# Altium PCB CBU-PCB.PcbDoc (part 2 of 2)
Units mm, origin at the board's own origin, x right, y up, seen from the top; angles counter-clockwise.
Board outline 133.83 x 85.72 mm, 4 copper layers (Top, GND, PWR, Bottom), stack 1.585 mm thick; 138 components, 74 nets, 476 pads, 131 vias.
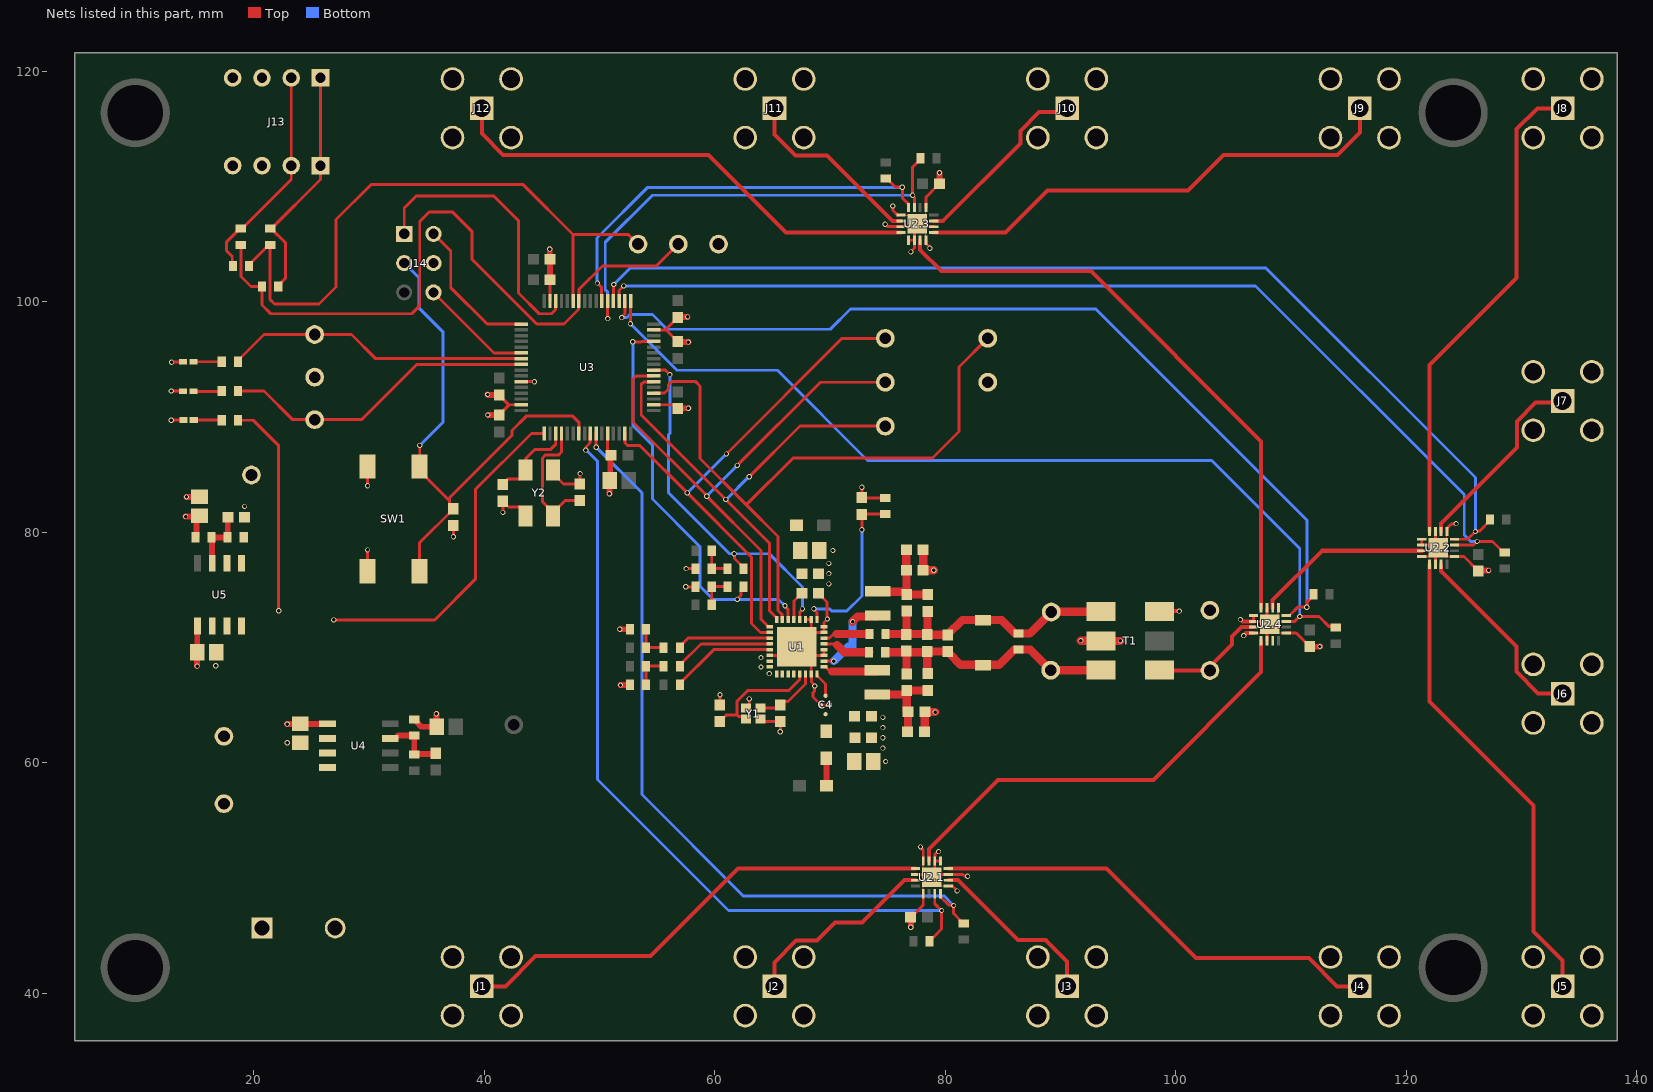
[diagram p4: the nets of this part, all layers, seen from the top]

## Via types
v1: diameter 0.45, hole 0.3, Top to Bottom, 131 vias

## Nets (pads, with @x,y where several pads share a name; then routed paths per layer and width w, separated by ;. In a path a pad name is that pad's centre, name@x,y a point inside that pad or via, vN(x,y) a via of type N, cw(c..) or ccw(c..) an arc to the next point about the centre after c; other vN are vias at no path point) (continued)
3V6: 3V6.1 C39.1 C40.1 J13.4 R28.2 U5.5 U5.6 | length 1.1
  Top w0.508: v1(14.148,83.058) 15.252,83.058 C40.1@15.265,83.071
  other v1: 19.193,82.236
ANTENNA_N: A_N.1 C13.1 C14.2 C15.2 C16.2 C19.2 C41.2 R10.1 R11.1 T1.4 | length 24.6
  Top w0.721: R11.1@74.817,71.163 C13.1@76.644,71.163 ; C13.1@76.632,71.128 76.644,71.14 C13.1@76.644,71.163 ; C19.2@76.657,73.144 76.644,73.131 C13.1@76.644,71.163 ; C16.2@78.486,73.118 78.461,73.093 C14.2@78.461,71.163 ; T1.4@93.524,73.101 93.511,73.088 89.218,73.088 87.339,71.21 R10.1@86.36,71.21 86.066,71.21 84.893,72.384 83.253,72.384 81.488,72.384 80.213,71.109 C15.2@80.213,71.086 80.205,71.094 78.443,71.094 C14.2@78.435,71.102 78.461,71.128 C14.2@78.461,71.163 ; C13.1@76.644,71.163 C14.2@78.461,71.163
ANTENNA_P: A_P.1 C9.2 C10.2 C13.2 C14.1 C15.1 C41.1 R4.1 R10.2 T1.6 | length 24.4
  Top w0.721: R4.1@74.792,69.588 C13.2@76.644,69.588 ; C13.2@76.632,69.674 76.644,69.661 C13.2@76.644,69.588 ; C10.2@76.657,67.708 76.644,67.721 C13.2@76.644,69.588 ; C14.1@78.435,69.648 C14.1@78.443,69.64 ; C9.2@78.461,67.724 78.448,67.737 C14.1@78.448,69.588 ; T1.6@93.524,68.021 A_P.1@89.154,68.021 87.365,69.81 R10.2@86.36,69.81 85.99,69.81 84.664,68.484 83.253,68.484 81.338,68.484 80.309,69.514 80.309,69.537 80.205,69.64 C14.1@78.443,69.64 ; C13.2@76.644,69.588 C14.1@78.448,69.588 ; C14.1@78.443,69.64 78.448,69.636 C14.1@78.448,69.588
GND: C1.2 C2.2 C3.2 C4.2 C5.2 C6.2 C7.2 C8.1 C11.2 C12.2 C17.1 C18.1 C20.2 C21.2 C22.1.2 C22.2.2 C22.3.2 C22.4.2 C23.2 C24.2 C25.2 C26.2 C27.2 C28.2 C29.2 C30.2 C31.2 C32.2 C33.2 C34.2 C35.2 C37.2 C38.2 C40.2 D1.1 D2.1 D3.1 GND.1 J1.2 J1.3 J1.4 J1.5 J2.2 J2.3 J2.4 J2.5 J3.2 J3.3 J3.4 J3.5 J4.2 J4.3 J4.4 J4.5 J5.2 J5.3 J5.4 J5.5 J6.2 J6.3 J6.4 J6.5 J7.2 J7.3 J7.4 J7.5 J8.2 J8.3 J8.4 J8.5 J9.2 J9.3 J9.4 J9.5 J10.2 J10.3 J10.4 J10.5 J11.2 J11.3 J11.4 J11.5 J12.2 J12.3 J12.4 J12.5 J13.3 J14.4 J15.2 R3.1 R5.1 R6.1 R14.1 R15.1 R27.1 R29.1 SW1.2 SW1.4 T1.3 T1.5 U1.3 U1.4 U1.7 U1.8 U1.10 U1.11 U1.22 U1.23 U1.24 U1.25 U1.26 U1.27 U1.28 U1.31 U1.33 U2.1.1 U2.1.5 U2.1.7 U2.1.9 U2.1.10 U2.1.12 U2.1.14 U2.1.17 U2.2.1 U2.2.5 U2.2.7 U2.2.9 U2.2.10 U2.2.12 U2.2.14 U2.2.17 U2.3.1 U2.3.5 U2.3.7 U2.3.9 U2.3.10 U2.3.12 U2.3.14 U2.3.17 U2.4.1 U2.4.5 U2.4.7 U2.4.9 U2.4.10 U2.4.12 U2.4.14 U2.4.17 U3.12 U3.18 U3.31 U3.47 U3.59 U3.63 U4.1 U5.1 Y1.2 Y1.4 Y2.2 Y2.4 | length 158.1
  Top w0.102: U2.3.5@76.151,107.513 76.826,107.513 U2.3.17@77.576,106.763 ; U2.1.1@78.092,48.621 78.092,49.296 U2.1.17@78.842,50.046 ; U2.1.12@78.092,51.471 78.092,50.796 78.592,50.296 U2.1.17@78.842,50.046 ; U2.3.12@78.326,105.338 78.326,106.013 77.826,106.513 U2.3.17@77.576,106.763 ; U2.3.1@78.326,108.188 78.326,107.513 U2.3.17@77.576,106.763 ; U2.1.5@80.267,49.296 79.592,49.296 U2.1.17@78.842,50.046 ; U2.4.12@106.746,71.259 107.421,71.259 U2.4.17@107.921,71.759 ; U2.4.5@108.921,73.434 108.919,73.432 108.921,73.43 108.921,72.759 U2.4.17@108.171,72.009 108.921,71.259 U2.4.1@109.596,71.259 ; C22.4.2@111.633,70.063 C22.4.2@111.633,70.086 ; U2.2.17@122.784,78.638 123.534,79.388 U2.2.5@123.534,80.063
  Top w0.152: U2.2.12@121.361,77.89 122.035,77.89 U2.2.17@122.534,78.388 ; U2.2.17@122.784,78.638 123.532,77.89 U2.2.1@124.209,77.888 U2.2.1@124.209,77.888
  Top w0.254: v1(12.827,89.713) 12.84,89.725 13.863,89.725 D3.1@13.876,89.738 ; v1(12.827,92.253) 12.84,92.24 13.838,92.24 D2.1@13.85,92.227 ; v1(12.852,94.742) 12.878,94.767 13.818,94.767 D1.1@13.843,94.793 ; SW1.4@29.856,76.603 29.87,76.618 v1(29.87,78.461) ; SW1.2@29.856,85.703 29.87,85.688 v1(29.87,84.023) ; v1(37.313,79.604) C34.2@37.313,80.578 ; C25.2@41.275,90.16 41.275,90.183 42.112,91.021 42.112,91.06 ; C26.2@41.275,91.92 41.275,91.897 42.112,91.06 ; v1(41.605,81.712) C24.2@41.605,82.664 ; C24.2@41.605,82.687 C24.2@41.605,82.664 ; U3.63@43.196,91.06 42.112,91.06 ; U3.59@43.196,93.06 v1(44.344,93.06) ; Y2.4@43.564,81.407 43.564,81.707 43.091,82.18 42.089,82.18 C24.2@41.605,82.664 ; U3.47@45.696,100.06 45.696,101.89 C27.2@45.71,101.905 ; Y2.2@45.964,85.407 45.964,85.107 46.88,84.191 C23.2@48.297,84.191 48.311,84.205 v1(48.311,85.09) ; U3.12@50.696,88.56 50.696,86.966 C32.2@50.997,86.665 ; R6.1@52.617,71.577 R6.1@52.626,71.586 ; U3.18@54.696,91.06 56.44,91.06 56.769,90.731 C30.2@56.769,90.729 ; U3.31@54.696,97.56 55.768,97.56 ; C29.2@56.769,96.536 56.769,96.559 55.768,97.56 ; C28.2@56.769,98.638 56.769,98.615 55.768,97.613 55.768,97.56 ; v1(57.48,75.26) 58.323,75.26 R14.1@58.335,75.273 ; v1(57.506,76.835) 58.332,76.835 R15.1@58.335,76.832 ; C20.2@60.441,65.007 60.452,65.018 v1(60.452,65.888) ; Y1.4@62.699,64.746 62.732,64.746 62.992,65.007 v1(62.992,65.532) ; Y1.2@63.974,63.771 64.182,63.563 C21.2@65.673,63.563 65.684,63.552 v1(65.684,62.687) ; U1.22@64.771,69.306 66.371,69.306 U1.33@67.121,70.056 U1.33@68.371,71.306 ; U1.11@67.871,72.406 U1.10@68.371,72.406 U1.33@68.371,71.306 ; C3.2@69.002,74.698 69.748,73.952 69.748,72.492 v1(69.774,72.466) 69.471,72.163 U1.8@69.471,71.806 U1.7@69.471,71.306 U1.33@68.371,71.306 ; U1.4@69.471,69.806 U1.3@69.471,69.306 67.871,69.306 68.371,68.806 U1.31@68.371,67.706 68.385,67.692 68.385,66.994 68.682,66.698 v1(68.682,66.65) 68.661,66.629 68.661,66.196 68.529,66.064 68.529,65.685 C4.2@69.21,65.004 C4.2@70.01,65.004 ; v1(72.771,83.896) C8.1@72.771,82.998 72.798,82.971 R3.1@74.803,82.971 ; v1(74.778,106.731) 74.831,106.731 75.049,106.513 U2.3.7@76.151,106.513 U2.3.17@77.326,106.513 ; v1(75.437,108.311) 75.474,108.273 75.474,107.918 U2.3.5@75.878,107.515 ; U2.3.9@76.826,105.338 U2.3.10@77.326,105.338 ; C22.1.2@76.987,46.574 C22.1.2@76.997,46.584 ; v1(77.018,104.321) 77.018,104.347 77.326,104.655 U2.3.10@77.326,105.338 ; C22.1.2@77.02,46.584 78.092,47.655 U2.1.1@78.092,48.621 ; U2.1.14@77.417,50.296 U2.1.17@78.592,50.296 ; U2.3.17@77.576,106.763 U2.3.17@77.326,106.513 ; U2.3.17@77.826,106.513 U2.3.14@79.001,106.513 ; v1(77.851,52.68) 77.851,52.627 78.092,52.386 U2.1.12@78.092,51.471 ; U2.3.12@78.326,105.338 78.326,105.067 78.626,104.766 78.626,104.686 v1(78.664,104.648) ; U2.3.1@78.326,108.188 78.326,109.077 79.469,110.221 C22.3.2@79.492,110.221 ; U2.1.17@78.842,50.046 U2.1.17@79.092,50.296 ; U2.1.10@79.121,51.848 79.121,52.058 79.31,52.248 79.401,52.248 v1(79.426,52.273) ; U2.1.9@79.592,51.471 U2.1.10@79.092,51.471 U2.1.17@79.092,50.296 ; U2.1.5@80.54,49.298 80.632,49.298 81.026,48.904 v1(81.026,48.87) ; v1(81.94,50.141) 81.918,50.164 81.677,50.164 81.546,50.296 U2.1.7@80.267,50.296 U2.1.17@79.092,50.296 ; U2.4.9@106.746,72.759 U2.4.10@106.746,72.259 U2.4.17@107.921,72.259 ; U2.4.14@107.921,70.584 107.921,71.759 U2.4.17@108.171,72.009 U2.4.17@107.921,72.259 ; U2.4.7@107.921,73.434 U2.4.17@107.921,72.259 ; U2.4.1@109.596,71.259 110.46,71.259 C22.4.2@111.633,70.086 ; U2.2.12@121.359,77.888 U2.2.12@121.361,77.89 ; U2.2.9@121.359,79.388 U2.2.10@121.359,78.888 U2.2.17@122.534,78.888 ; U2.2.14@122.534,77.213 122.534,78.388 U2.2.17@122.784,78.638 U2.2.17@122.534,78.888 ; U2.2.7@122.534,80.063 U2.2.17@122.534,78.888 ; U2.2.5@123.536,80.336 123.908,80.709 124.295,80.709 v1(124.333,80.747) ; U2.2.1@124.209,77.888 125.014,77.888 C22.2.2@126.263,76.639 ; U2.3.10@77.326,105.338 U2.3.17@77.326,106.513
  Top w0.349: T1.3@98.604,73.101 98.655,73.152 v1(100.306,73.152) ; v1(105.613,72.415) 105.64,72.415 105.797,72.259 U2.4.10@106.746,72.259 ; v1(105.911,71.025) 105.93,71.045 105.93,71.081 106.108,71.259 U2.4.12@106.746,71.259
  Top w0.508: v1(14.072,81.356) C40.2@15.202,81.356 ; R29.1@14.921,79.553 15.017,79.649 C40.2@15.017,81.171 ; v1(15.062,68.377) C38.2@15.062,69.571 15.088,69.596 15.088,71.824 U5.1@15.113,71.849 ; v1(22.885,63.348) 24.015,63.348 C35.2@24.028,63.361 24.035,63.367 26.377,63.367 U4.1@26.383,63.373 ; R27.1@33.909,63.743 34.009,63.743 34.105,63.647 34.105,63.547 34.533,63.119 C37.2@35.852,63.119 35.839,63.131 v1(35.839,64.237) ; v1(40.284,91.948) 40.312,91.92 C26.2@41.275,91.92 ; v1(40.31,90.17) 40.319,90.16 C25.2@41.275,90.16 ; v1(45.669,104.572) 45.669,103.724 C31.2@45.71,103.683 C27.2@45.71,101.905 ; v1(50.851,83.337) 50.851,84.468 C33.2@50.863,84.48 50.93,84.547 50.93,86.598 C32.2@50.997,86.665 ; v1(51.765,71.577) R6.1@52.617,71.577 ; v1(51.816,66.726) 52.592,66.726 R5.1@52.626,66.76 ; C30.2@56.769,90.729 56.794,90.754 v1(57.709,90.754) ; C29.2@56.769,96.536 56.81,96.495 v1(57.709,96.495) ; C28.2@56.769,98.638 56.81,98.679 v1(57.633,98.679) ; C22.1.2@76.997,46.584 77.013,46.568 v1(77.013,45.72) ; C22.3.2@79.492,110.221 79.492,111.192 v1(79.502,111.201) ; C22.4.2@111.633,70.063 112.506,70.063 v1(112.522,70.079) ; C22.2.2@126.263,76.616 126.33,76.683 v1(127.152,76.683)
  Top w0.721: C18.1@78.086,78.461 78.081,78.456 78.081,76.713 C17.1@78.076,76.708 78.093,76.691 v1(79,76.691) ; C11.2@78.197,62.679 78.214,62.697 78.214,64.389 C12.2@78.232,64.406 78.249,64.389 v1(79.121,64.389) ; v1(91.772,70.587) 93.499,70.587 T1.5@93.524,70.561 v1(95.201,70.561)
  other v1: 74.828,60.096 74.595,61.262 74.595,62.151 74.595,63.04 74.595,63.929 64.729,67.729 64.008,68.301 64.008,69.113 69.901,75.514 69.901,76.403 69.901,77.292 70.256,78.41
LED0: LED0.1 R24.2 U3.55 | length 26.5
  Top w0.254: R24.2@18.607,94.793 18.607,94.893 20.869,97.155 LED0.1@25.273,97.155 28.473,97.155 30.568,95.06 U3.55@43.196,95.06
LED1: LED1.1 R25.2 U3.56 | length 27.6
  Top w0.254: R25.2@18.607,92.253 20.879,92.253 23.368,89.764 LED1.1@25.273,89.764 29.337,89.764 34.134,94.56 U3.56@43.196,94.56
NetC1_1: C1.1 C2.1 C3.1 FB1.1 U1.13 | length 2.6
  Top w0.254: U1.13@66.871,72.406 66.871,74.021 C3.1@67.548,74.698 ; C3.1@67.474,74.672 C3.1@67.497,74.672
NetC4_1: C4.1 U1.32 | length 2.2
  Top w0.254: U1.32@68.871,67.706 68.871,67.556 69.61,66.816 C4.1@69.61,65.804
NetC4_3: C4.3 C5.1 C6.1 C7.1 FB3.1
NetC8_2: C8.2 R3.2 U1.9 | length 15
  Top w0.254: v1(68.598,73.351) 68.598,73.298 68.871,73.025 U1.9@68.871,72.406 ; v1(72.771,80.213) C8.2@72.771,81.544 72.798,81.571 R3.2@74.803,81.571
  Bottom w0.254: v1(68.598,73.351) 69.951,73.351 70.15,73.152 71.45,73.152 72.771,74.473 v1(72.771,80.213)
NetC9_1: C9.1 C10.1 C11.1 C12.1 L1.2 | length 7.8
  Top w0.721: L1.2@74.092,65.913 L1.2@74.606,65.913 ; L1.2@74.695,65.823 L1.2@74.606,65.913 ; C10.1@76.339,65.913 L1.2@74.606,65.913 ; C11.1@76.743,62.679 76.761,62.697 76.761,64.389 C12.1@76.778,64.406 76.761,64.406 76.665,64.502 76.665,66.262 78.453,66.262 C9.1@78.461,66.27
NetC16_1: C16.1 C17.2 C18.2 C19.1 L2.2 | length 8.9
  Top w0.721: L2.2@74.143,74.871 74.698,74.871 L2.2@74.787,74.961 ; L2.2@74.185,74.828 76.427,74.828 76.538,74.717 76.561,74.717 C19.1@76.64,74.638 ; C18.2@76.632,78.461 76.627,78.456 76.627,76.713 76.64,76.7 C19.1@76.64,74.638 ; C16.1@78.486,74.572 78.473,74.585 76.67,74.585 C19.1@76.657,74.598 76.64,74.615 C19.1@76.64,74.638
NetC20_1: C20.1 U1.29 Y1.1 | length 10.6
  Top w0.254: C20.1@60.441,63.553 60.441,63.576 60.77,63.905 60.793,63.905 61.039,64.151 61.925,64.151 ; Y1.1@62.699,63.771 62.468,64.002 62.074,64.002 61.925,64.151 ; U1.29@67.371,67.706 67.371,67.219 66.396,66.243 62.84,66.243 61.925,65.329 61.925,64.151
NetC21_1: C21.1 U1.30 Y1.3 | length 5.6
  Top w0.254: Y1.3@63.974,64.746 65.403,64.746 C21.1@65.673,65.017 ; C21.1@65.673,65.04 65.941,65.307 66.349,65.307 67.871,66.83 U1.30@67.871,67.706
NetC23_1: C23.1 U3.4 Y2.1 | length 11.7
  Top w0.254: Y2.1@45.964,81.407 Y2.1@45.964,81.707 ; U3.4@46.696,88.56 46.696,86.955 46.457,86.716 45.311,86.716 45.037,86.442 45.037,86.439 45.034,86.436 45.034,82.637 Y2.1@45.964,81.707 ; C23.1@48.297,82.737 46.995,82.737 Y2.1@45.964,81.707
NetC24_1: C24.1 U3.3 Y2.3 | length 7.7
  Top w0.254: C24.1@41.605,84.141 41.605,84.164 42.076,84.634 43.091,84.634 43.564,85.107 Y2.3@43.564,85.407 43.632,85.475 43.632,86.431 44.392,87.191 45.764,87.191 46.196,87.623 U3.3@46.196,88.56
NetC36_2: C36.2 R26.1 R27.2 U4.7 | length 5.8
  Top w0.508: U4.7@31.833,62.103 32.258,62.103 32.498,62.343 R27.2@33.909,62.343 R26.1@33.909,60.695 33.968,60.754 35.729,60.754 C36.2@35.789,60.814
NetC39_2: C39.2 R28.1 R29.2 U5.7 | length 5.4
  Top w0.508: U5.7@16.383,77.299 16.352,77.33 16.352,79.522 R29.2@16.321,79.553 R28.1@17.715,79.553 17.727,79.565 17.727,81.268 C39.2@17.739,81.28
NetD1_2: D1.2 R24.1 | length 2.5
  Top w0.254: D1.2@14.743,94.793 R24.1@17.207,94.793
NetD2_2: D2.2 R25.1 | length 2.5
  Top w0.254: D2.2@14.75,92.227 17.182,92.227 R25.1@17.207,92.253
NetD3_2: D3.2 R30.1 | length 2.4
  Top w0.254: D3.2@14.776,89.738 17.182,89.738 R30.1@17.207,89.713
NetFB2_1: FB2.1 FB3.2 | length 2.4
  Top w0.508: FB3.2@69.686,60.372 69.69,60.368 69.69,57.994 FB2.1@69.693,57.991
NetJ13_1: J13.1 R20.1 R22.1 | length 20.7
  Top w0.254: R22.1@21.412,106.339 R22.1@21.512,106.339 ; R20.1@22.112,101.321 22.112,101.421 22.733,102.041 22.733,105.118 R22.1@21.512,106.339 ; J13.1@25.781,119.431 J13.1@25.781,111.811 25.781,110.607 R22.1@21.512,106.339
NetJ13_2: J13.2 R21.2 R23.2 | length 19
  Top w0.254: R23.2@18.172,103.099 18.117,103.153 18.117,103.93 17.602,104.445 17.602,105.169 18.772,106.339 R21.2@18.872,106.339 18.972,106.339 23.241,110.607 J13.2@23.241,111.811 J13.2@23.241,119.431
NetL1_1: L1.1 U1.1 | length 4.5
  Top w0.254: U1.1@69.471,68.306 69.621,68.306 69.905,68.021
  Top w0.721: 70.171,67.903 73.111,67.903 73.132,67.923 74.002,67.923 L1.1@74.092,68.013
NetL2_1: L2.1 U1.2 | length 7.6
  Top w0.254: U1.2@69.471,68.806 69.477,68.811 70.32,68.811 v1(70.326,68.817)
  Top w0.721: v1(71.958,72.238) 72.402,72.681 74.053,72.681 L2.1@74.143,72.771
  Bottom w0.721: v1(70.326,68.817) 71.587,70.079 71.958,70.079 v1(71.958,72.238)
NetR1_1: R1.1 R5.2 R8.2 | length 3.1
  Top w0.254: R5.2@54.026,66.76 R1.1@54.026,68.368 R8.2@55.561,68.368
NetR2_1: R2.1 R6.2 R9.2 | length 3.1
  Top w0.254: R6.2@54.026,71.586 R2.1@54.026,69.977 R9.2@55.561,69.977
NetR4_2: R4.2 U1.5 | length 4.2
  Top w0.254: U1.5@69.471,70.306 70.512,70.306 70.612,70.206
  Top w0.721: 70.612,70.206 71.23,69.588 R4.2@73.392,69.588
NetR7_1: R7.1 U1.21 | length 9.1
  Top w0.254: R7.1@56.961,66.76 56.961,66.86 59.907,69.806 U1.21@64.771,69.806
NetR8_1: R8.1 U1.20 | length 8.7
  Top w0.254: R8.1@56.961,68.368 56.961,68.468 58.798,70.306 U1.20@64.771,70.306
NetR9_1: R9.1 U1.19 | length 8.2
  Top w0.254: R9.1@56.961,69.977 56.961,70.077 57.69,70.806 U1.19@64.771,70.806
NetR11_2: R11.2 U1.6 | length 4.1
  Top w0.254: U1.6@69.471,70.806 69.494,70.829 69.965,70.829 70.299,71.163 70.569,71.163
  Top w0.721: 70.569,71.163 R11.2@73.417,71.163
NetR12_2: R12.2 R14.2 R16.1 | length 2.9
  Top w0.254: R16.1@59.735,73.713 R14.2@59.735,75.273 R12.2@61.087,75.273
NetR13_2: R13.2 R15.2 R17.1 | length 2.9
  Top w0.254: R17.1@59.735,78.392 R15.2@59.735,76.832 R13.2@61.087,76.832
NetT1_1: A_S.1 T1.1 U2.4.11 | length 10.3
  Top w0.349: T1.1@98.63,68.047 T1.1@98.604,68.021 98.63,67.996 A_S.1@102.972,67.996 102.972,68.341 104.902,70.272 104.902,70.942 105.719,71.759 U2.4.11@106.746,71.759
NetU2.1_11: U2.1.11 U2.4.13 | length 39
  Top w0.349: U2.1.11@78.592,51.471 78.592,52.506 84.582,58.496 98.069,58.496 107.421,67.847 U2.4.13@107.421,70.584
NetU2.4_6: U2.2.11 U2.4.6 | length 15.4
  Top w0.349: U2.4.6@108.421,73.434 108.421,74.131 112.678,78.388 U2.2.11@121.359,78.388
NetU2.4_8: U2.3.11 U2.4.8 | length 51.8
  Top w0.349: U2.3.11@77.826,105.338 77.826,104.496 79.654,102.667 92.634,102.667 107.421,87.88 U2.4.8@107.421,73.434
NetU2.4_15: U2.4.15
NRST: C34.1 J14.3 SW1.1 SW1.3 U3.7 | length 47.3
  Top w0.254: SW1.3@34.356,76.603 34.356,79.052 C34.1@37.313,82.009 ; v1(34.392,87.528) 34.392,85.739 SW1.1@34.356,85.703 34.356,85.353 36.984,82.725 ; C34.1@37.301,82.021 36.984,82.338 36.984,82.725 ; U3.7@48.196,88.56 48.196,89.548 47.676,90.068 43.637,90.068 42.405,88.837 42.405,88.405 36.984,82.983 36.984,82.725
  Bottom w0.254: J14.3@33.045,103.353 34.341,102.057 34.341,99.441 36.424,97.358 36.424,89.56 v1(34.392,87.528)
RF0: J1.1 U2.1.13 | length 41.9
  Top w0.349: J1.1@39.776,40.589 41.834,40.589 44.45,43.205 54.432,43.205 62.023,50.796 U2.1.13@77.417,50.796
RF1: J2.1 U2.1.15 | length 17.3
  Top w0.349: J2.1@65.176,40.589 65.176,42.672 67.056,44.552 68.859,44.552 70.434,46.126 72.796,46.126 76.466,49.796 U2.1.15@77.417,49.796
RF2: J3.1 U2.1.6 | length 15.4
  Top w0.349: U2.1.6@80.267,49.796 81.116,49.796 86.309,44.602 88.722,44.602 90.576,42.748 J3.1@90.576,40.589
RF3: J4.1 U2.1.8 | length 39.9
  Top w0.349: U2.1.8@80.267,50.796 93.984,50.796 101.752,43.028 111.557,43.028 113.995,40.589 J4.1@115.976,40.589
RF4: J5.1 U2.2.13 | length 41.4
  Top w0.349: U2.2.13@122.034,77.213 122.034,65.291 131.064,56.261 131.064,45.339 133.579,42.824 J5.1@133.579,40.589
RF5: J6.1 U2.2.15 | length 16.8
  Top w0.349: U2.2.15@123.034,77.213 123.034,76.61 129.565,70.079 129.565,67.894 131.46,66 J6.1@133.568,66
RF6: J7.1 U2.2.6 | length 17
  Top w0.349: U2.2.6@123.034,80.063 123.034,80.768 129.616,87.351 129.616,89.611 131.244,91.239 133.428,91.239 J7.1@133.579,91.389
RF7: J8.1 U2.2.8 | length 42.8
  Top w0.349: U2.2.8@122.034,80.063 122.034,94.5 129.591,102.057 129.591,114.986 131.394,116.789 J8.1@133.579,116.789
RF8: J9.1 U2.3.13 | length 42.7
  Top w0.349: U2.3.13@79.001,106.013 85.236,106.013 88.875,109.652 101.053,109.652 104.152,112.751 114.046,112.751 115.976,114.681 J9.1@115.976,116.789
RF9: J10.1 U2.3.15 | length 16.3
  Top w0.349: U2.3.15@79.001,107.013 79.784,107.013 86.512,113.741 86.512,114.833 88.14,116.461 90.248,116.461 J10.1@90.576,116.789
RF10: J11.1 U2.3.6 | length 16.3
  Top w0.349: J11.1@65.176,116.789 65.176,114.529 67.005,112.7 69.748,112.7 75.435,107.013 U2.3.6@76.151,107.013
RF11: J12.1 U2.3.8 | length 42.1
  Top w0.349: J12.1@39.776,116.789 39.776,114.605 41.631,112.751 59.436,112.751 66.174,106.013 U2.3.8@76.151,106.013
S\P\I\_\R\F\I\D\_\C\S\: CS.1 U1.15 U3.20 | length 58.3
  Top w0.254: U3.20@54.696,92.06 54.719,92.083 55.634,92.083 55.986,92.435 55.986,92.797 56.254,93.066 58.344,93.066 58.725,92.685 58.725,86.385 62.738,82.372 ; U1.15@65.871,72.406 65.848,72.429 65.848,72.841 65.481,73.208 65.481,79.629 62.738,82.372 ; CS.1@83.693,96.825 81.204,94.336 81.204,88.748 78.892,86.436 66.802,86.436 62.738,82.372
SEL0: R18.1.1 U2.1.4 U3.10 | length 67.7
  Top w0.254: U3.10@49.696,88.56 49.702,88.554 49.702,87.382 v1(49.708,87.376) ; U2.1.4@79.592,48.621 79.592,48.35 80.304,47.637 80.684,47.637 v1(80.721,47.6) 80.721,46.92 81.287,46.354 81.287,46.254 81.51,46.031 R18.1.1@81.61,46.031
  Bottom w0.254: v1(49.708,87.376) 53.67,83.414 53.67,57.226 62.459,48.438 79.883,48.438 v1(80.721,47.6)
SEL1: R19.1.1 U2.1.3 U3.9 | length 70.1
  Top w0.254: v1(48.793,87.122) 48.831,87.16 48.831,87.39 49.173,87.732 49.173,88.537 U3.9@49.196,88.56 ; R19.1.1@78.627,44.501 78.627,44.601 78.85,44.824 78.95,44.824 79.68,45.553 v1(79.68,47.168) 79.092,47.756 U2.1.3@79.092,48.621
  Bottom w0.254: v1(48.793,87.122) 48.844,87.122 49.809,86.157 49.809,58.547 61.189,47.168 v1(79.68,47.168)
SEL2: R18.2.1 U2.2.4 U3.36 | length 92.9
  Top w0.254: U3.36@51.196,100.06 51.214,100.078 51.214,101.48 v1(51.232,101.498) ; U2.2.4@124.209,79.388 125.337,79.388 v1(126.009,80.061) 126.047,80.098 126.387,80.098 127.291,81.002 R18.2.1@127.291,81.102
  Bottom w0.254: v1(51.232,101.498) 52.68,102.946 107.798,102.946 126.009,84.734 v1(126.009,80.061)
SEL3: R19.2.1 U2.2.3 U3.35 | length 91.7
  Top w0.254: U3.35@51.696,100.06 51.696,100.97 v1(52.098,101.371) ; U2.2.3@124.209,78.888 125.83,78.888 126.141,79.199 v1(126.161,79.199) ; v1@126.086,79.172 126.113,79.199 127.497,79.199 128.449,78.246 R19.2.1@128.549,78.246
  Bottom w0.254: v1(52.098,101.371) 106.934,101.371 125.044,83.261 125.044,79.756 125.601,79.199 v1(126.161,79.199)
SEL4: R18.3.1 U2.3.4 U3.38 | length 37.7
  Top w0.254: v1(49.812,101.619) 50.173,101.258 50.173,100.083 U3.38@50.196,100.06 ; R18.3.1@74.832,110.688 74.932,110.688 75.67,109.95 76.258,109.95 v1(76.276,109.931) 76.276,109.008 76.826,108.459 U2.3.4@76.826,108.188
  Bottom w0.254: v1(49.812,101.619) 49.784,101.647 49.784,105.537 54.178,109.931 v1(76.276,109.931)
SEL5: R19.3.1 U2.3.3 U3.37 | length 41.2
  Top w0.254: U3.37@50.696,100.06 50.696,99.147 50.673,99.124 50.673,98.574 v1(50.704,98.543) ; U2.3.3@77.326,108.188 77.326,109.032 77.165,109.192 v1(77.165,109.245) 77.165,111.674 77.837,112.346 R19.3.1@77.837,112.446
  Bottom w0.254: v1(50.704,98.543) 50.704,100.838 50.495,101.046 50.495,105.156 54.585,109.245 v1(77.165,109.245)
SEL6: R18.4.1 U2.4.4 U3.34 | length 81
  Top w0.254: v1(51.918,98.628) 51.918,98.681 52.196,98.959 U3.34@52.196,100.06 ; U2.4.4@109.596,72.759 109.867,72.759 110.629,73.521 110.883,73.521 110.884,73.52 111.341,73.52 v1(111.379,73.482) 111.417,73.52 111.417,73.959 111.957,74.5 R18.4.1@111.957,74.6
  Bottom w0.254: v1(51.918,98.628) 51.934,98.645 52.371,98.645 52.609,98.882 54.585,98.882 55.855,97.612 70.028,97.612 71.78,99.365 93.066,99.365 111.379,81.051 v1(111.379,73.482)
SEL7: R19.4.1 U2.4.3 U3.33 | length 78.9
  Top w0.254: v1(52.68,98.095) 52.688,98.103 52.688,100.052 U3.33@52.696,100.06 ; U2.4.3@109.596,72.259 109.598,72.261 110.332,72.261 110.752,72.681 v1(110.77,72.681) 112.435,72.681 113.319,71.796 113.816,71.796 R19.4.1@113.894,71.718
  Bottom w0.254: v1(52.68,98.095) 56.718,94.056 65.43,94.056 73.254,86.233 103.124,86.233 110.77,78.587 v1(110.77,72.681)
SPI_RFID_MISO: MISO.1 U1.16 U3.22 | length 43
  Top w0.254: U3.22@54.696,93.06 54.673,93.037 53.82,93.037 53.619,92.837 53.619,90.17 v1(60.947,82.842) 64.745,79.045 64.745,73.182 65.371,72.556 U1.16@65.371,72.406 ; v1(62.992,84.811) 67.386,89.205 MISO.1@74.803,89.205
  Bottom w0.254: v1(60.947,82.842) 60.985,82.842 62.954,84.811 v1(62.992,84.811)
SPI_RFID_MOSI: MOSI.1 U1.17 U3.23 | length 48
  Top w0.254: U3.23@54.696,93.56 53.174,93.56 52.908,93.294 52.908,89.56 59.296,83.172 v1(59.296,83.121) 64.008,78.41 64.008,72.442 64.644,71.806 U1.17@64.771,71.806 ; v1(61.951,85.801) 69.164,93.015 MOSI.1@74.803,93.015
  Bottom w0.254: v1(59.296,83.121) 59.296,83.134 61.951,85.788 v1(61.951,85.801)
SPI_RFID_SCK: SCK.1 U1.18 U3.15 | length 46.3
  Top w0.254: U3.15@52.196,88.56 52.196,87.758 52.426,87.528 53.492,87.528 v1(57.607,83.414) 63.195,77.826 63.195,72.085 63.975,71.305 U1.18@64.771,71.306 ; v1(61.011,86.792) 71.044,96.825 SCK.1@74.803,96.825
  Bottom w0.254: v1(57.607,83.414) 57.62,83.414 60.998,86.792 v1(61.011,86.792)
SWCLK: J14.2 U3.49 | length 12.7
  Top w0.254: J14.2@35.585,105.893 37.084,104.394 37.084,101.219 40.243,98.06 U3.49@43.196,98.06
SWDIO: J14.1 U3.46 | length 24.6
  Top w0.254: J14.1@33.045,105.893 33.045,108.128 34.087,109.169 40.818,109.169 42.951,107.036 42.951,100.762 44.755,98.958 45.822,98.958 46.173,99.31 46.173,100.037 U3.46@46.196,100.06
SWO: J14.6 U3.54 | length 9.8
  Top w0.254: J14.6@35.585,100.813 40.838,95.56 U3.54@43.196,95.56
UART_BLE_RX: R22.2 R23.1 RX.1 U3.43 | length 55.2
  Top w0.254: R23.1@19.572,103.099 19.795,103.322 19.795,103.422 21.312,104.939 R22.2@21.412,104.939 21.412,100.178 21.793,99.797 25.654,99.797 27.127,101.27 27.127,107.137 30.15,110.16 43.383,110.16 47.696,105.847 ; U3.43@47.696,100.06 47.696,105.847 ; RX.1@53.34,105.004 52.495,105.847 47.696,105.847
UART_BLE_TX: R20.2 R21.1 TX.1 U3.42 | length 60.2
  Top w0.254: R21.1@18.872,104.939 18.872,102.184 19.736,101.321 R20.2@20.712,101.321 20.712,99.709 21.463,98.958 33.706,98.958 34.392,99.644 34.392,106.959 35.204,107.772 37.262,107.772 38.913,106.121 38.913,103.708 44.552,98.069 46.917,98.069 48.173,99.325 48.173,100.037 U3.42@48.196,100.06 48.196,101.053 50.241,103.099 54.927,103.099 TX.1@56.832,105.004
UART_RFID_RX/I\R\Q\_\O\U\T\: R12.1 U1.14 U3.29 | length 36.2
  Top w0.254: v1(52.883,96.52) 53.589,96.52 53.63,96.56 U3.29@54.696,96.56 ; v1(61.951,74.168) 61.951,74.221 62.264,74.534 62.264,75.05 R12.1@62.487,75.273 ; v1(66.091,73.609) 66.091,73.556 66.371,73.276 U1.14@66.371,72.406
  Bottom w0.254: v1(52.883,96.52) 52.883,89.256 54.585,87.554 54.585,82.88 58.699,78.765 58.699,75.336 59.868,74.168 v1(61.951,74.168) 65.532,74.168 v1(66.091,73.609)
UART_RFID_TX/I\R\Q\_\I\N\: R13.1 U1.12 U3.24 | length 31.5
  Top w0.254: U3.24@54.696,94.06 55.724,94.06 v1(56.109,93.675) ; v1(61.671,78.13) 61.709,78.093 61.709,77.711 62.487,76.932 R13.1@62.487,76.832 ; U1.12@67.371,72.406 67.371,73.06 67.603,73.292 v1(67.603,73.345)
  Bottom w0.254: v1(56.109,93.675) 56.109,88.581 55.982,88.454 55.982,83.414 61.265,78.13 v1(61.671,78.13) 64.719,78.13 67.615,75.235 67.615,73.357 v1(67.603,73.345)
VBATT: C35.1 C38.1 J15.1 R30.2 U3.1 U4.2 U4.3 U4.4 U5.2 U5.3 U5.4 VBATT.1 | length 48.3
  Top w0.254: R30.2@18.607,89.713 19.939,89.713 22.149,87.503 v1(22.149,73.177) ; v1(26.924,72.39) 35.687,72.39 39.218,75.921 39.218,83.693 44.085,88.56 U3.1@45.196,88.56
  other v1: 22.885,61.722 16.688,68.402
pads on no net: MH1.1 MH2.1 MH3.1 MH4.1 T1.2 U2.1.16 U2.2.16 U2.3.16 U2.4.16 U3.2 U3.5 U3.6 U3.8 U3.11 U3.14 U3.16 U3.17 U3.21 U3.25 U3.26 U3.27 U3.28 U3.39 U3.40 U3.41 U3.44 U3.45 U3.50 U3.51 U3.52 U3.53 U3.57 U3.58 U3.60 U3.61 U4.8 U5.8

## Polygon pours and split planes (outlines as drawn)
3V3 on PWR "3V3_L03_P001" (solid, pour order 1): 22.733,75.235 29.718,75.235 29.718,35.865 138.303,35.865 138.303,121.59 22.733,121.59
VBATT on PWR "VBATT_L03_P003" (solid, pour order 3): 4.47,35.865 28.448,35.865 28.448,73.965 4.47,73.965
3V6 on PWR "3V6_L03_P002" (solid, pour order 2): 4.47,75.235 21.463,75.235 21.463,121.59 4.47,121.59
NetC1_1 on Top "NETC1_1_L01_P012" (solid, pour order 12): 66.827,75.26 67.043,74.651 67.424,74.27 68.021,74.27 68.021,79.375 67.716,79.68 67.716,81.102 66.472,81.102 66.472,79.629 66.827,79.273
GND on Top "GND_L01_P011" (solid, pour order 11): 69.113,74.193 70.561,75.641 70.561,79.146 68.504,79.146 68.504,74.193
3V3 on Top "3V3_L01_P008" (solid, pour order 8): 31.166,61.087 32.512,61.087 32.995,60.604 32.995,60.274 33.452,59.817 39.04,59.817 39.04,58.903 32.868,58.903 32.461,59.309 31.166,59.309
NetC4_3 on Top "NETC4_3_L01_P016" (solid, pour order 16): 72.593,59.436 71.476,59.436 71.476,61.011 70.307,62.179 69.19,62.179 69.19,64.133 69.46,64.404 72.583,64.404 72.593,64.393
GND on Top "GND_L01_P006" (solid, pour order 6): 73.198,64.387 73.198,59.461 75.179,59.461 75.179,64.361 75.179,64.387
GND on Top "GND_L01_P014" (solid, pour order 14): 67.005,67.412 67.005,68.021 65.075,68.021 65.075,69.444 63.627,69.444 63.627,68.072 64.287,67.412
3V6 on Top "3V6_L01_P010" (solid, pour order 10): 17.424,76.708 17.424,78.054 17.907,78.537 18.237,78.537 18.694,78.994 18.694,82.652 19.609,82.652 19.609,78.41 19.202,78.003 19.202,76.708
VBATT on Top "VBATT_L01_P009" (solid, pour order 9): 16.129,67.945 16.129,72.441 19.101,72.441 19.101,70.739 17.45,69.088 17.272,68.91 17.272,67.945
VBATT on Top "VBATT_L01_P007" (solid, pour order 7): 22.53,62.306 27.026,62.306 27.026,59.334 25.324,59.334 23.673,60.985 23.495,61.163 22.53,61.163
GND on GND "GND_L02_P000" (solid, pour order 0): 4.47,35.865 137.668,35.865 137.668,120.955 4.47,120.955

## Silkscreen, mask and mechanical layers (free items; w line width, h text height)
Top Overlay:
  drawing of 28 lines, arcs and shapes, not listed
  text "A12" at 35.33,119.355 h1.27 r180
  text "A11" at 60.46,119.355 h1.27 r180
  text "A10" at 86.181,119.355 h1.27 r180
  text "A9" at 111.387,119.355 h1.27 r180
  text "Pin 1" at 29.134,115.834 h1.02 r90
  text "Pin 4" at 15.748,115.571 h1.02 r90
  text "A8" at 136.322,110.101 h1.27 r90
  text "BLE Module" at 27.987,109.499 h1.27 r180
  text "SWDIO" at 26.189,105.385 h1.02
  text "SWCLK" at 37.871,105.385 h1.02
  text "NRST" at 27.035,102.845 h1.02
  text "GND" at 37.871,102.845 h1.02
  text "3V3" at 28.051,100.305 h1.02
  text "SWO" at 37.871,100.305 h1.02
  text "EECS 473 F23 / Maize Toss / Cornhole Board Unit" at 95.047,98.095 h1.52
  text "A7" at 136.322,96.055 h1.27 r90
  text "Nathaniel Kalantar / Evan Eidt / Maia Herrington / Elham Islam / Jose Vargas" at 95.123,84.836 h1.27
  text "A6" at 136.322,70.782 h1.27 r90
  text "Battery Connecter" at 12.884,51.731 h1.27
  text "\"All sins are forgiven at 13 MHz\" / - Alanson Sample" at 91.542,49.301 h1.27
  text "A5" at 136.322,45.611 h1.27 r90
  text "+" at 14.199,44.552 h1.52
  text "-" at 31.827,44.45 h1.52
  text "A1" at 44.053,37.77 h1.27
  text "A2" at 69.715,37.77 h1.27
  text "A3" at 95.014,37.77 h1.27
  text "A4" at 120.21,37.77 h1.27